# EAGLE board jphy_pwr.v1.job (EAGLE 6.1)
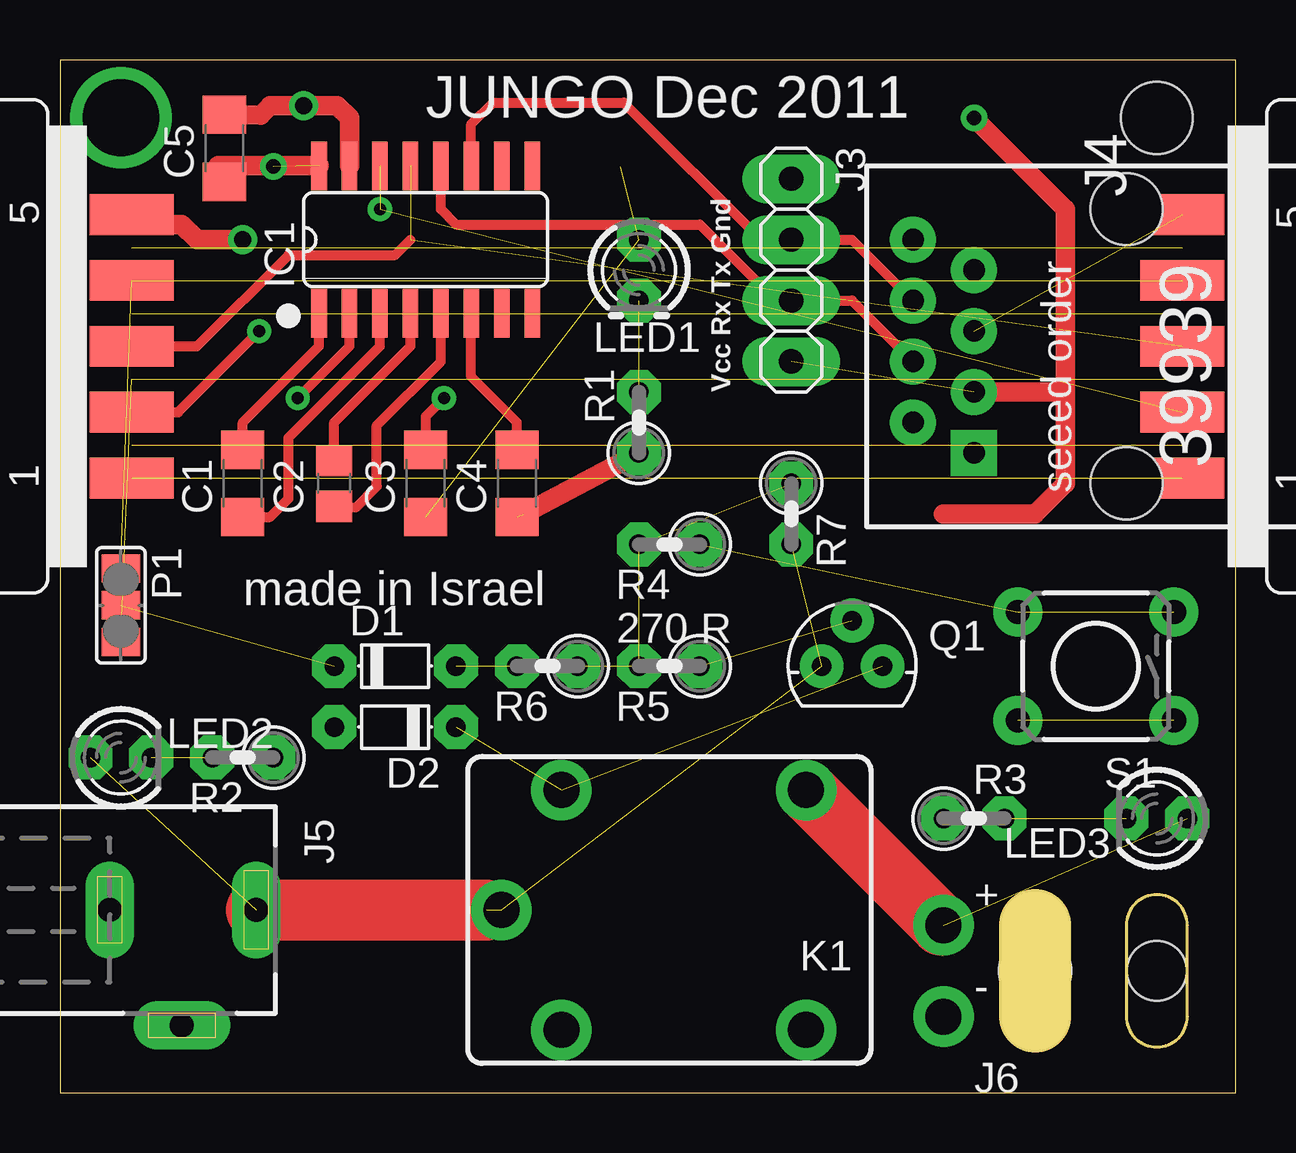
[diagram p0: board, top side]
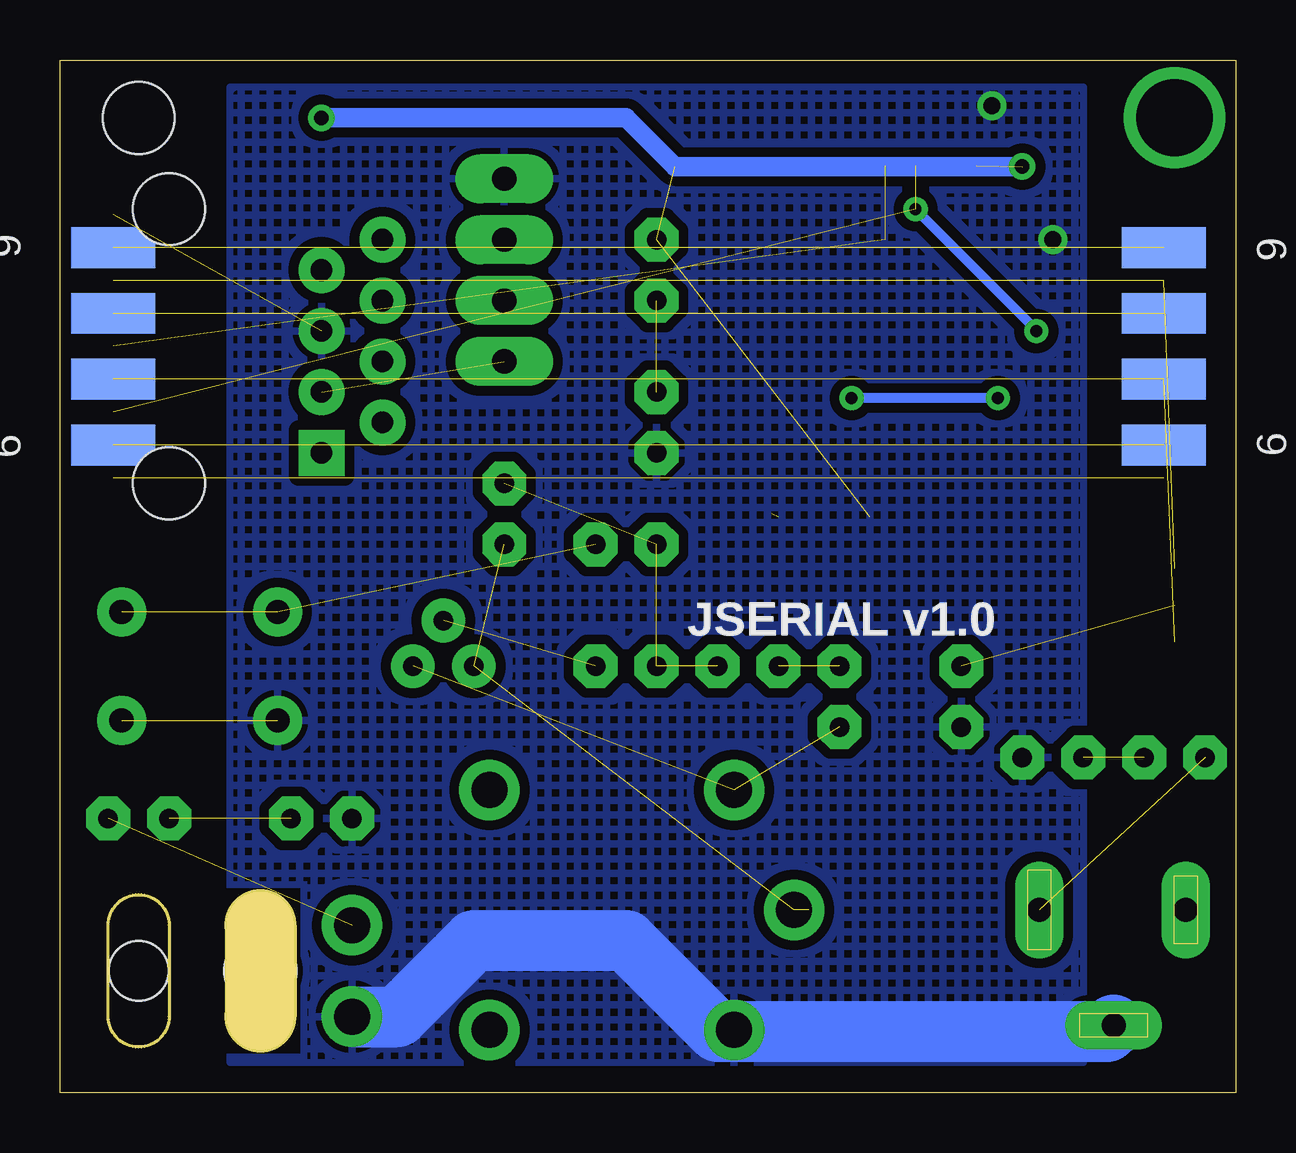
[diagram p1: board, bottom side, seen from below]

Size 49 x 43.05 mm. Coordinates in mm from the lower left corner, seen from the top.
Outline: 0,0 49,0 49,43.05 0,43.05 0,0
Copper layers (1*16): Top 0.035mm / dielectric 1.5mm / Bottom 0.035mm
Design rules: minimum track width 6mil, minimum drill 12mil, track to track 6mil, track to pad 6mil, pad to pad 6mil, via to via 6mil, smd to smd 0mil, copper to edge 10mil, drill to drill 10mil, minimum pad ring 20mil, minimum via ring 10mil, stop-mask expansion 2mil, vias tented up to drill 100mil, thermal gap 10mil
Net classes: 0 default: width 0.406 mm, drill 0.5 mm, clearance 0.406 mm; 1 power: width 0.813 mm, clearance 0.406 mm; 2 wires: width 254 mm
Holes 3 mm at 45.72,40.64

## Footprints (pad centres in the part's own frame; a part is rotated, then mirrored left to right if it is on the bottom)
C1206 = smd 1.6 x 1.8: 1 -1.4,0; 2 1.4,0
C0805 = smd 1.3 x 1.5: 1 -0.95,0; 2 0.95,0
D-5 = drill 0.813 octagon: A 2.54,0; C -2.54,0
SO16 = smd 0.66 x 2.032: 1 -4.445,-3.073; 2 -3.175,-3.073; 3 -1.905,-3.073; 4 -0.635,-3.073; 5 0.635,-3.073; 6 1.905,-3.073; 7 3.175,-3.073; 8 4.445,-3.073; 9 4.445,3.073; 10 3.175,3.073; 11 1.905,3.073; 12 0.635,3.073; 13 -0.635,3.073; 14 -1.905,3.073; 15 -3.175,3.073; 16 -4.445,3.073
RJ45-NO-SHIELD = drill 0.9 pad 1.4 square: 1 -4.445,6.35 | drill 0.9 pad 1.4: 2 -3.175,8.89; 3 -1.905,6.35; 4 -0.635,8.89; 5 0.635,6.35; 6 1.905,8.89; 7 3.175,6.35; 8 4.445,8.89 | hole 3: -5.715,0; 5.715,0
F09D = smd 1.7 x 3.5: 1 -5.486,-6.045; 2 -2.743,-6.045; 3 0,-6.045; 4 2.743,-6.045; 5 5.486,-6.045 | smd 1.7 x 3.5 bottom: 6 -4.115,-6.045; 7 -1.372,-6.045; 8 1.372,-6.045; 9 4.115,-6.045
1X04 = drill 1.016 long: 1 -3.81,0; 2 -1.27,0; 3 1.27,0; 4 3.81,0
M09D = smd 1.7 x 3.5: 1 5.486,-6.045; 2 2.743,-6.045; 3 0,-6.045; 4 -2.743,-6.045; 5 -5.486,-6.045 | smd 1.7 x 3.5 bottom: 6 4.115,-6.045; 7 1.372,-6.045; 8 -1.372,-6.045; 9 -4.115,-6.045
DCJ0202 = drill 1 pad 2 long: 1 0,3.1; 2 4.8,0; 3 0,-3
FLEX-POWER = drill 1.5: 1 -2.54,1.905; 2 -2.54,-1.905 | hole 3: 1.27,0 | hole 2.5: 6.35,0
CQ1 = drill 1.5: 1 4.5,-5; 2 4.5,5; C 7,0; NC -5.7,-5; NO -5.7,5
LED3MM = drill 0.813 octagon: A -1.27,0; K 1.27,0
3P-SMD-4.8X2 = smd 1.168 x 1.6: 1 -1.524,0; 2 0,0; 3 1.524,0
TO-92-TRIANGLE = drill 0.813 pad 1.524: 1 -1.27,0; 2 0,1.905; 3 1.27,0
0207/2V = drill 0.813 octagon: 1 -1.27,0; 2 1.27,0
TACTILE-PTH = drill 1.016 pad 1.88: 1 -3.251,2.261; 2 3.251,2.261; 3 -3.251,-2.261; 4 3.251,-2.261

## Placement (x,y rotation side)
C1  0.47 uF  [C1206]  7.62,25.4 90 top
C2  0.47 uF  [C0805]  11.43,25.4 90 top
C3  0.47 uF  [C1206]  15.24,25.4 90 top
C4  0.47 uF  [C1206]  19.05,25.4 90 top
C5  0.47 uF  [C1206]  6.86,39.37 90 top
D1  [D-5]  13.97,17.78 0 top
D2  [D-5]  13.97,15.24 180 top
IC1  MAX3232ESE  [SO16]  15.24,35.56 0 top
J1  RJ45-8X  [RJ45-NO-SHIELD]  44.45,31.11 90 top
J2  [F09D]  -3.05,31.11 90 top
J3  [1X04]  30.48,34.29 270 top
J4  [M09D]  52.83,31.11 270 top
J5  DCJ0202  [DCJ0202]  5.08,7.62 270 top
J6  [FLEX-POWER]  39.37,5.08 0 top
K1  CQ1-12V  [CQ1]  25.4,7.62 180 top
LED1  Green  [LED3MM]  24.13,34.29 270 top
LED2  Red  [LED3MM]  2.54,13.97 0 top
LED3  Red  [LED3MM]  45.72,11.43 180 top
P1  [3P-SMD-4.8X2]  2.54,20.32 270 top
Q1  [TO-92-TRIANGLE]  33.02,17.78 0 top
R1  270 R  [0207/2V]  24.13,27.94 90 top
R2  270 R  [0207/2V]  7.62,13.97 180 top
R3  270 R  [0207/2V]  38.1,11.43 0 top
R4  270 R  [0207/2V]  25.4,22.86 180 top
R5  270 R  [0207/2V]  25.4,17.78 180 top
R6  270 R  [0207/2V]  20.32,17.78 180 top
R7  270 R  [0207/2V]  30.48,24.13 270 top
S1  [TACTILE-PTH]  43.18,17.78 180 top

## Library data of the parts
C1-C5 R1-R7 = rcl
D1 D2 = diode
IC1 = maxim; MF: MAXIM; MPN: MAX3232ESE; OC_FARNELL: 9725539; OC_NEWARK: 79C3880
J1 = jlab; MPN: RJ45-8X; OC_FARNELL: unknown; OC_NEWARK: 16R6101
J2 = con-subd; OC_FARNELL: unknown; OC_NEWARK: unknown
J3 = pinhead
J4 = jlab; OC_FARNELL: unknown; OC_NEWARK: unknown
J5 = con-jack; OC_FARNELL: unknown; OC_NEWARK: unknown
J6 = jlab
K1 = relay; OC_FARNELL: unknown; OC_NEWARK: unknown
LED1-LED3 = led
P1 Q1 = Discrete
S1 = SparkFun

## Nets
12VOUT [power]: J6.1 K1.NC LED3.A
+12V [power]: J5.1 K1.C LED2.A Q1.1 R7.2
CTS [wires]: J2.8 J4.8
DCD [wires]: J2.1 J4.1
DSR [wires]: J2.6 J4.6
DTR: J2.4 J4.4 P1.1
GND [power]: C4.1 C5.2 D2.A IC1.15 J1.5 J2.5 J3.1 J4.5 J5.2 J6.2 K1.2 R1.1 R2.1 R3.1 S1.1 S1.2
N$1: LED1.K R1.2
N$2: C3.2 IC1.2
N$3: C4.2 IC1.6
N$4: C1.1 IC1.3
N$5: C1.2 IC1.1
N$6: C2.1 IC1.5
N$7: C2.2 IC1.4
N$8: LED2.K R2.2
N$9: LED3.K R3.2
N$10: D2.C K1.1 Q1.3
N$11: R4.1 S1.3 S1.4
N$12: Q1.2 R5.1
N$13: D1.A R6.2
N$14: R4.2 R5.2 R6.1 R7.1
PWR_MNG: D1.C P1.2
RI [wires]: J2.9 J4.9
RTS: J2.7 J4.7 P1.3
RX_TTL: IC1.12 J1.4 J3.3
RXD: IC1.14 J2.2 J4.2
TX_TTL: IC1.11 J1.6 J3.2
TXD: IC1.13 J2.3 J4.3
VCC [power]: C3.1 C5.1 IC1.16 J1.3 J3.4 LED1.A

## Tracks (layer width: path | path; a pad name or v marks a point on that pad's centre or on a via)
12VOUT  (1 unrouted)
  Top 2.54: K1.NC 36.73,6.99 J6.1
+12V  (4 unrouted)
  Top 2.54: J5.1 17.78,7.62
CTS  (1 unrouted)
DCD  (1 unrouted)
DSR  (1 unrouted)
DTR  (2 unrouted)
GND  (via drill 0.7, 0.7 pad 0.25)  (3 unrouted)
  Top 0.813: 19.32,24.13 R1.1 | J2.5 1.91,36.27 1.98,36.2 5.08,36.2 5.71,35.56 v7.62,35.56 | IC1.15 12.06,40.64 11.56,41.15 v10.16,41.15 8.76,41.15 8.37,40.75 C5.2
  Bottom 2.54: J5.2 5.36,2.54 21.59,2.54 25.4,6.35 31.75,6.35 34.92,3.17 J6.2
  pour Bottom (hatched): 6.35,41.91 6.35,1.27 41.91,1.27 41.91,41.91
N$1  (1 unrouted)
N$2  (via drill 0.5)
  Top 0.406: v16,28.96 15.24,28.19 C3.2 | v9.91,28.96 12.06,31.11 IC1.2
  Bottom 0.406: v9.91,28.96 v16,28.96
N$3
  Top 0.406: IC1.6 17.14,29.84 19.05,27.94 C4.2
N$4
  Top 0.406: C1.1 8.76,24 9.53,24.77 9.53,27.3 13.34,31.11 IC1.3
N$5
  Top 0.406: C1.2 7.62,27.94 10.79,31.11 IC1.1
N$6
  Top 0.406: C2.1 12.34,24.4 13.21,25.27 13.21,27.81 15.88,30.48 IC1.5
N$7
  Top 0.406: C2.2 11.43,27.94 14.61,31.11 IC1.4
N$8  (1 unrouted)
N$9  (1 unrouted)
N$10  (2 unrouted)
N$11  (2 unrouted)
N$12  (1 unrouted)
N$13  (1 unrouted)
N$14  (3 unrouted)
N$155  (via drill 3.2)
  other vias: 2.54,40.64
PWR_MNG  (1 unrouted)
RI  (1 unrouted)
RTS  (2 unrouted)
RX_TTL
  Top 0.406: J1.4 33.02,33.02 J3.3 29.84,33.02 26.67,36.2 16.51,36.2 15.88,36.83 IC1.12
RXD  (via drill 0.5)  (2 unrouted)
  Top 0.406: v8.31,31.75 4.93,28.37 J2.2
  Bottom 0.406: v8.31,31.75 8.26,31.75 v13.34,36.83
TX_TTL
  Top 0.406: J1.6 33.02,35.56 J3.2 29.21,35.56 23.5,41.27 18.04,41.27 17.14,40.38 IC1.11
TXD  (2 unrouted)
  Top 0.406: 14.61,35.56 13.97,34.92 9.53,34.92 5.71,31.11 J2.3
VCC  (via drill 0.6)  (4 unrouted)
  Top 0.813: 41.91,29.21 J1.3 | 41.91,29.21 41.91,25.4 40.64,24.13 36.83,24.13 | C5.1 6.6,38.63 IC1.16 | 41.91,29.21 41.91,36.83 v38.1,40.64
  Bottom 0.813: v38.1,40.64 25.4,40.64 23.37,38.61 v8.89,38.61

## Text on the board
tNames: JUNGO Dec 2011 | Vcc Rx Tx Gnd | 39939 | seeed order | made in Israel
bNames: JSERIAL v1.0